# Altium PCB Main.PcbDoc
Units mm, origin at the board's own origin, x right, y up, seen from the top; angles counter-clockwise.
Board outline 99 x 40.5 mm, 4 copper layers (Top Layer, Ground Layer, Power Layer, Bottom Layer), stack 1.591 mm thick; 14 components, 11 nets, 65 pads, 2 vias.
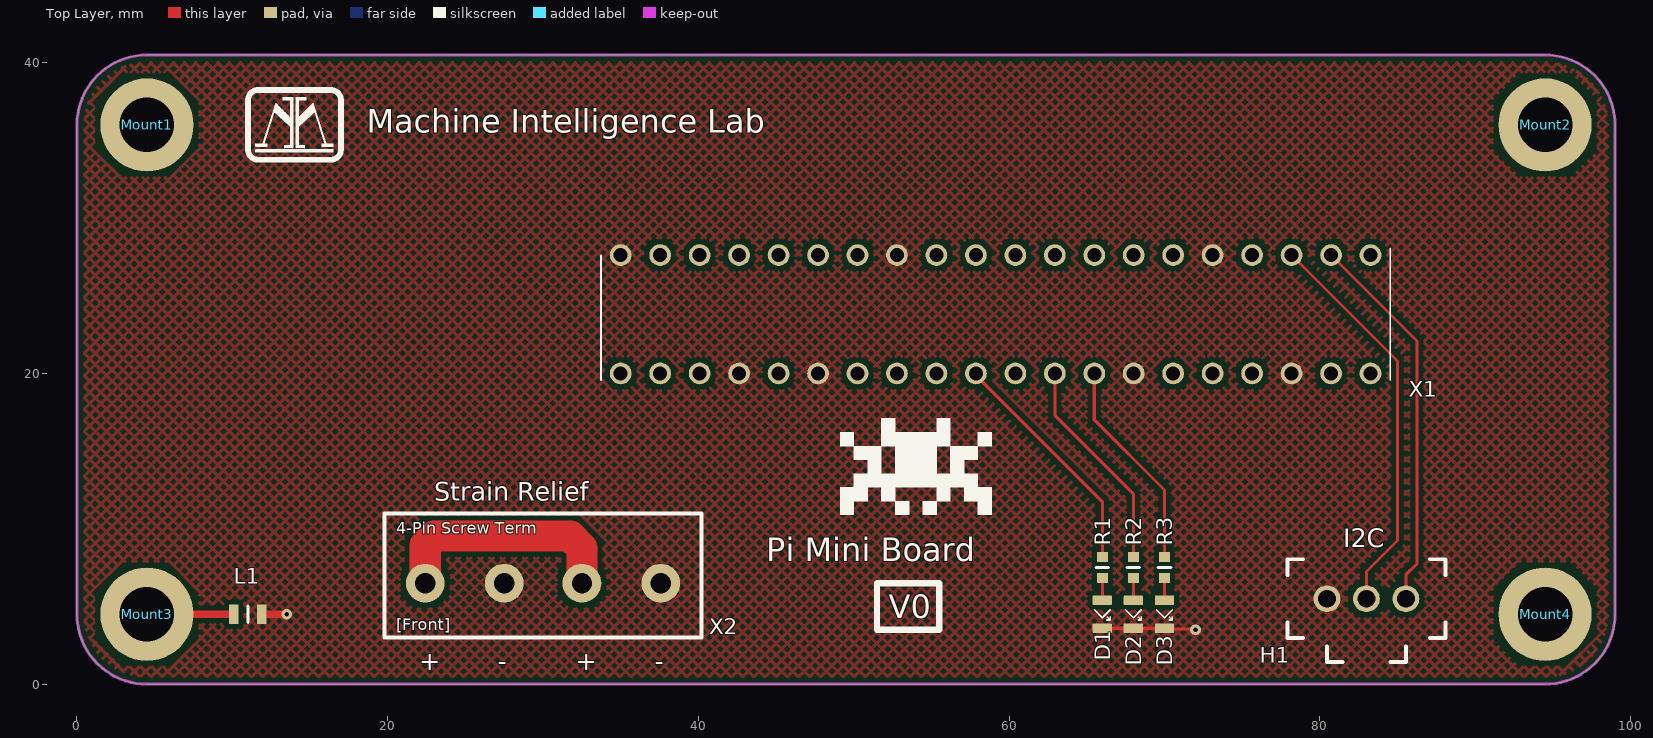
[diagram p0: Top Layer view]
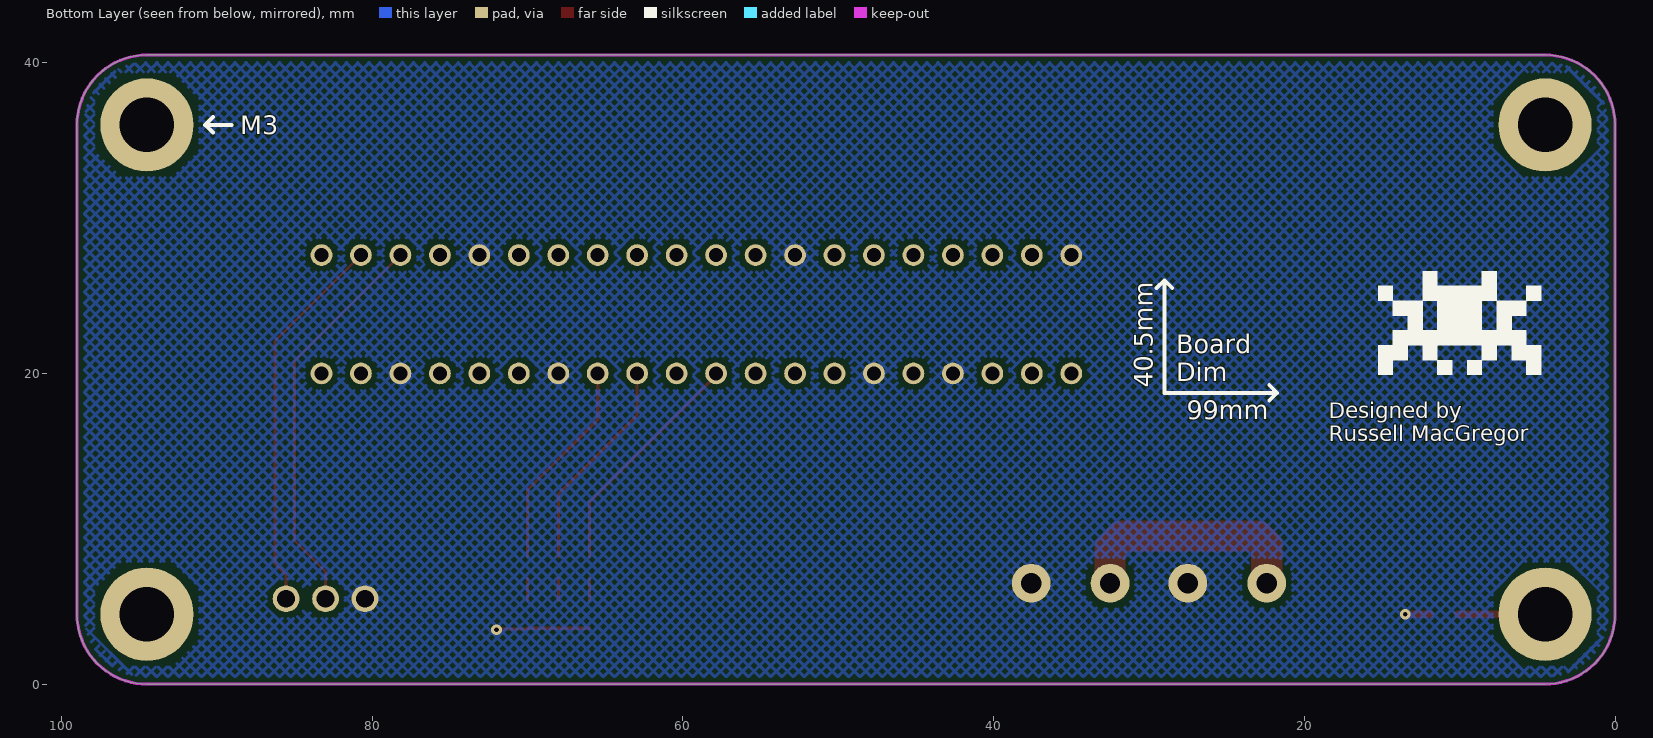
[diagram p1: Bottom Layer view, seen from below]
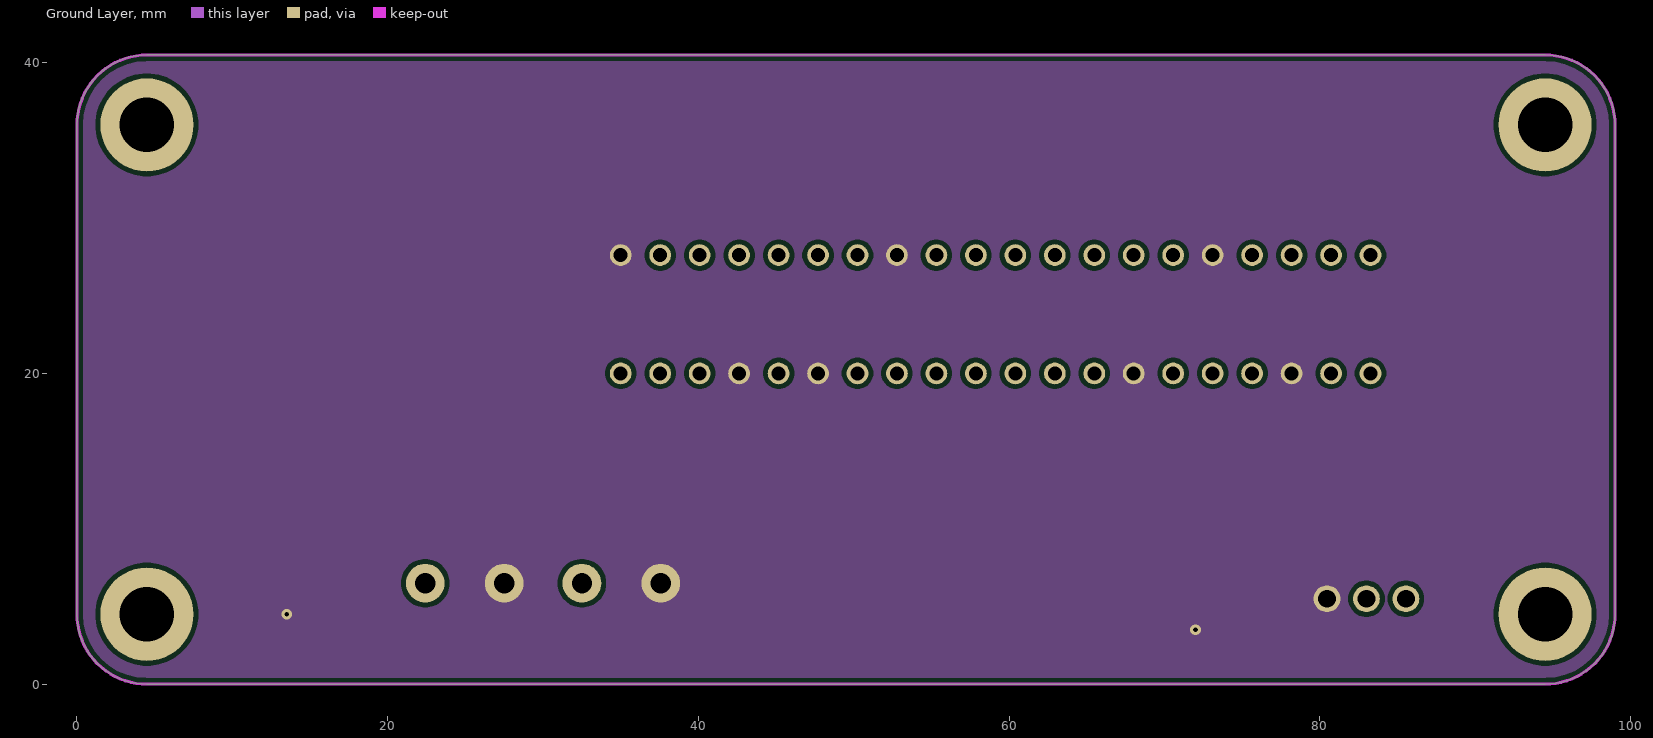
[diagram p2: Ground Layer]
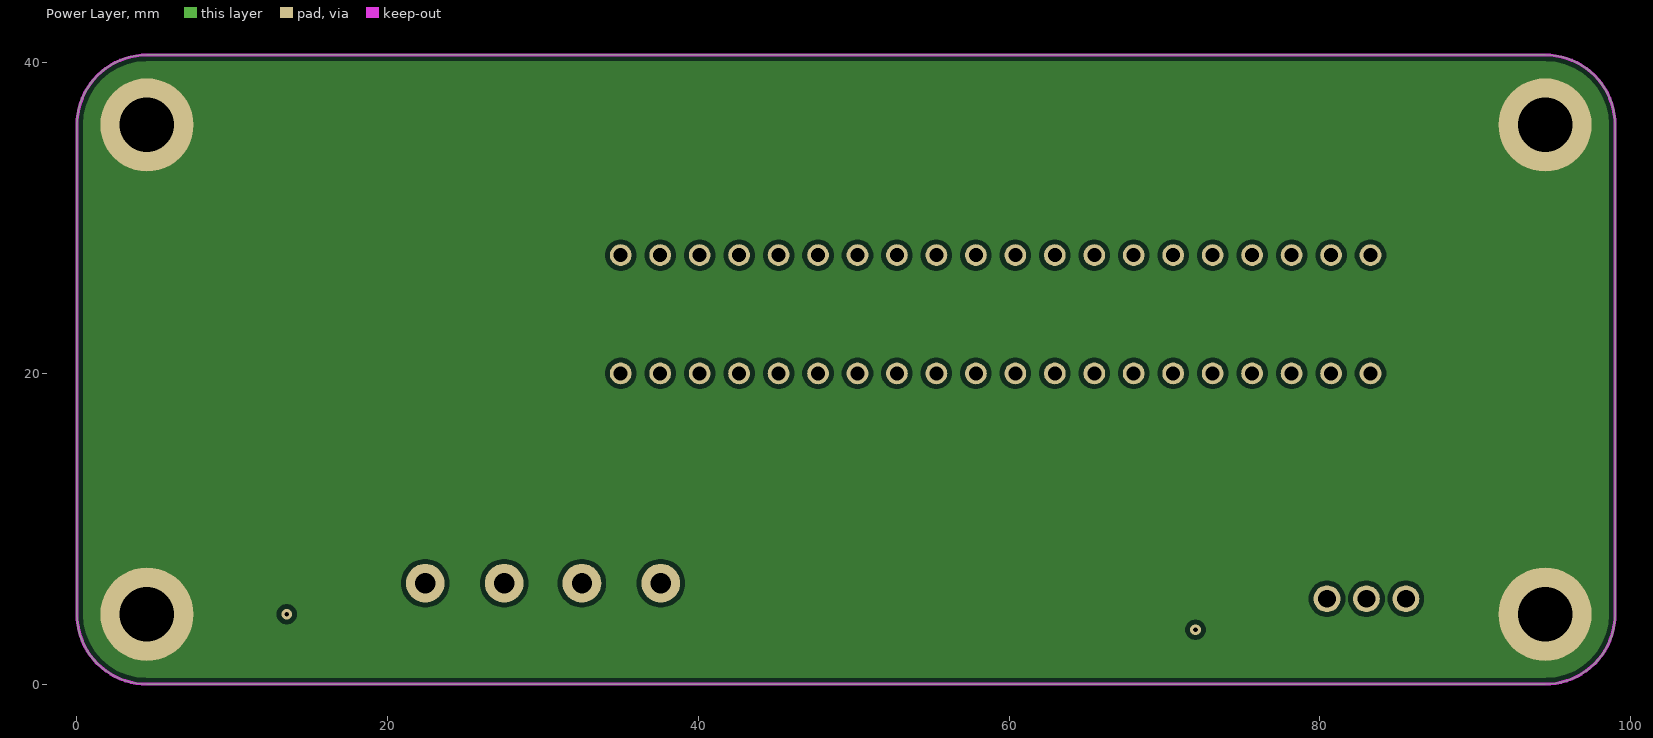
[diagram p3: Power Layer]

## Layer stack, top to bottom
Top Solder: solder mask 0.0102, Solder Resist, Dk 3.8
Top Layer: signal copper 0.035
Dielectric 2: prepreg 0.2104, 7628*1, Dk 4.4
Ground Layer: signal copper 0.0175
Dielectric 1: dielectric 1.065, FR-4, Dk 4.8
Power Layer: signal copper 0.0175
Dielectric 3: prepreg 0.2104, 7628*1, Dk 4.4
Bottom Layer: signal copper 0.035
Bottom Solder: solder mask 0.0102, Solder Resist, Dk 3.8

## Board outline
0,4.5 0,36 cw(c4.5,36) 4.5,40.5 94.5,40.5 cw(c94.5,36) 99,36 99,4.5 cw(c94.5,4.5) 94.5,0 4.5,0 cw(c4.5,4.5)

## Design rules (kind name [scope] priority, off if disabled: settings)
BoardOutlineClearance [All] p1: gap=0.2 ignorepadtopadclearanceinfootprint=FALSE
Clearance "inPolygon Clearance" [InPolygon] p1: gap=0.3 ignorepadtopadclearanceinfootprint=TRUE // this rule ensures that every net within a polygon of a different net has a set clearance from the poly
Clearance "Different Diff Pair" [All] p2: gap=0.2 ignorepadtopadclearanceinfootprint=TRUE
Clearance "Same Diff Pair" [All] p3: gap=0.1 ignorepadtopadclearanceinfootprint=TRUE
Clearance "Different Nets" [not InAnyDifferentialPair] p4: gap=0.3 ignorepadtopadclearanceinfootprint=TRUE except(0.1: Arc-SMDPad Arc-THPad Arc-Via Arc-Text Track-SMDPad Track-THPad Track-Via Track-Text SMDPad-Text THPad-Text Via-Text Fill-Text Poly-Text Region-Text Text-Text; 0.12: Arc-Arc Arc-Track Track-Track; 0.15: SMDPad-SMDPad SMDPad-THPad SMDPad-Via THPad-THPad THPad-Via Via-Via; 0.2: Arc-Hole Track-Hole SMDPad-Hole THPad-Hole Via-Hole Fill-Hole Poly-Hole Region-Hole Text-Hole)
Clearance "Same Net" [not InAnyDifferentialPair] p5: gap=0 ignorepadtopadclearanceinfootprint=TRUE except(0.1: THPad-Via; 0.18: Arc-Arc Arc-Track Track-Track)
ComponentClearance [All] p1: gap=0.102 collisioncheckmode=3 verticalgap=0.102 showdistances=TRUE
DiffPairsRouting "Ethernet Routing" [InDifferentialPairClass('Ethernet_Pairs')] p1: maxlimit=0.25 minlimit=0.2 mostfreqgap=0.25 toplayer_maxgap=0.2 toplayer_prefgap=0.2 toplayer_minwidth=0.25 toplayer_maxwidth=0.25 toplayer_prefwidth=0.25 midlayer1_mingap=0.25 midlayer1_minwidth=0.19 midlayer1_maxwidth=0.19 midlayer1_prefwidth=0.19 midlayer2_mingap=0.25 midlayer2_minwidth=0.19 midlayer2_maxwidth=0.19 midlayer2_prefwidth=0.19 bottomlayer_maxgap=0.2 bottomlayer_prefgap=0.2 bottomlayer_minwidth=0.25 bottomlayer_maxwidth=0.25 bottomlayer_prefwidth=0.25 impedanceprofiledriven=TRUE maxuncoupledlength=12.7
DiffPairsRouting "USB Routing" [InDifferentialPairClass('USB_Pairs')] p2: maxlimit=0.291 minlimit=0.127 mostfreqgap=0.291 toplayer_maxgap=0.127 toplayer_prefgap=0.127 toplayer_minwidth=0.23 toplayer_maxwidth=0.23 toplayer_prefwidth=0.23 midlayer1_mingap=0.291 midlayer1_minwidth=0.25 midlayer1_maxwidth=0.25 midlayer1_prefwidth=0.25 midlayer2_mingap=0.291 midlayer2_minwidth=0.25 midlayer2_maxwidth=0.25 midlayer2_prefwidth=0.25 bottomlayer_maxgap=0.127 bottomlayer_prefgap=0.127 bottomlayer_minwidth=0.23 bottomlayer_maxwidth=0.23 bottomlayer_prefwidth=0.23 impedanceprofiledriven=TRUE maxuncoupledlength=12.7
DiffPairsRouting "CAN Routing" [InDifferentialPairClass('CAN_Pairs')] p3: maxlimit=0.907 minlimit=0.5 mostfreqgap=0.907 toplayer_maxgap=0.5 toplayer_prefgap=0.5 toplayer_minwidth=0.201 toplayer_maxwidth=0.201 toplayer_prefwidth=0.201 midlayer1_mingap=0.907 midlayer1_minwidth=0.155 midlayer1_maxwidth=0.155 midlayer1_prefwidth=0.155 midlayer2_mingap=0.907 midlayer2_minwidth=0.155 midlayer2_maxwidth=0.155 midlayer2_prefwidth=0.155 bottomlayer_maxgap=0.5 bottomlayer_prefgap=0.5 bottomlayer_minwidth=0.201 bottomlayer_maxwidth=0.201 bottomlayer_prefwidth=0.201 impedanceprofiledriven=TRUE maxuncoupledlength=12.7
Height [All] p1: minheight=0 maxheight=1816.048 prefheight=12.7
HoleSize [All] p1: absolutevalues=TRUE maxlimit=6.3 minlimit=0.3 maxpercent=80.000 minpercent=20.000
HoleToHoleClearance [All] p1: gap=0.25 allowstackedmicrovias=FALSE
Length [All] p1: maxlimit=43.432 minlimit=0 usedelayunits=TRUE mindelay=0.000000 maxdelay=10000.000000
MatchedLengths "Diff Pair Matched Delays" [InDifferentialPairClass('Ethernet_Pairs') or InDifferentialPairClass('USB_Pairs') or InDifferentialPairClass('CAN_Pairs')] p1: tolerance=5 checknetsindiffpair=TRUE checkdiffpairvsdiffpair=FALSE checkxsignals=FALSE checkothers=FALSE usedelayunits=TRUE delaytolerance=100.000000
MinimumAnnularRing [All] p1: minimumring=0.2
MinimumSolderMaskSliver [All] p1: minsoldermaskwidth=0
PlaneClearance "Supply Net Clearance" [InNetClass('Supply_Nets')] p1: clearance=0.5
PlaneClearance "All Nets" [All] p2: clearance=0.3
PolygonConnect "Supply Nets" [InNetClass('Supply_Nets')] p1: connectstyle=Direct reliefconductorwidth=0.3 reliefentries=4 polygonreliefangle="90 Angle" airgapwidth=0.254
PolygonConnect General [All] p2: connectstyle=Relief reliefconductorwidth=0.254 reliefentries=4 polygonreliefangle="90 Angle" airgapwidth=0.254
RoutingVias [All] p1: holewidth=0.2 width=0.35 viastyle="Through Hole" minholewidth=0.15 minwidth=0.3 maxholewidth=6.3 maxwidth=6.55
SilkToSilkClearance [All] p1: silktosilkclearance=0
SilkToSolderMaskClearance [All] p1: minsilkscreentomaskgap=0 clearancetoexposedcopper=TRUE
SolderMaskExpansion [All] p1: expansion=0.075 istentingtop=FALSE
SupplyNets "Schematic Supply Nets" [InNet('+5V')] p1: voltage=0.000
SupplyNets "Schematic Supply Nets_3" [InNet('GND')] p2: voltage=0.000
SupplyNets "Schematic Supply Nets_1" [InNet('Earth')] p3: voltage=0.000
UnRoutedNet [All] p1: checkbadconnections=TRUE
Width "nRF Width" [InNetClass('nRF Signal')] p1: maxlimit=0.379 minlimit=0.263 preferedwidth=0.379 toplayer_minwidth=0.379 midlayer1_maxwidth=0.263 midlayer1_prefwidth=0.263 midlayer2_maxwidth=0.263 midlayer2_prefwidth=0.263 bottomlayer_minwidth=0.379 impedanceprofiledriven=TRUE minimp=50.000000 maximp=50.000000 favimp=50.000000 checkconnectedcopper=TRUE
Width [All] p2: maxlimit=100 minlimit=0.1 preferedwidth=0.3
20 further rules are at their usual default settings.

## Classes and differential pairs
net class Supply_Nets: +5V Earth GND

## Components (designator, comment, footprint, x,y, rotation, side; value= is the part's Value field where it differs from the comment)
D1 "SMD LED" "[LED] SMD 0805" 66,4.5 r270 top
D2 "SMD LED" "[LED] SMD 0805" 68,4.5 r270 top
D3 "SMD LED" "[LED] SMD 0805" 70,4.5 r270 top
H1 "1x3 Male" "[Header] Shrouded 1x3 Male" 83,5.5 r180 top
L1 "652-MH2029-300Y" "[Ferrite] SMD Bead 0805 (1)" 11,4.5 r0 top
Mount1 "M3 Mount Hole" "[Mount] M3 Mount Hole" 4.5,36 r0 top
Mount2 "M3 Mount Hole" "[Mount] M3 Mount Hole" 94.5,36 r90 top
Mount3 "M3 Mount Hole" "[Mount] M3 Mount Hole" 4.5,4.5 r90 top
Mount4 "M3 Mount Hole" "[Mount] M3 Mount Hole" 94.5,4.5 r90 top
R1 "[Res] SMD Resistor" "[Res] SMD 0603" 66,7.5 r90 top
R2 "[Res] SMD Resistor" "[Res] SMD 0603" 68,7.5 r90 top
R3 "[Res] SMD Resistor" "[Res] SMD 0603" 70,7.5 r90 top
X1 "Raspberry Pi 5" "[Device] Raspberry Pi 5" 35,20 r0 top
X2 "4pin Screw Terminal" "[Screw Terminal] 4pin 5mm" 30,6.5 r0 top

## Footprints (in the part's own frame and the unit in brackets; to place one, negate y for a bottom-side part, rotate by r counter-clockwise, add the part's x,y. Pads: shape width x height; smd on the part's side, far side on the other; paste and mask are expansions set on the pad)
"[Device] Raspberry Pi 5" [mm]
  round 1.4 hole 0.9: 1(48.26,7.62) 2(48.26,0) 3(45.72,7.62) 4(45.72,0) 5(43.18,7.62) 7(40.64,7.62) 8(40.64,0) 10(38.1,0) 11(35.56,7.62) 12(35.56,0) 13(33.02,7.62) 15(30.48,7.62) 16(30.48,0) 17(27.94,7.62) 18(27.94,0) 19(25.4,7.62) 20(25.4,0) 21(22.86,7.62) 22(22.86,0) 23(20.32,7.62) 24(20.32,0) 26(17.78,0) 27(15.24,7.62) 28(15.24,0) 29(12.7,7.62) 31(10.16,7.62) 32(10.16,0) 33(7.62,7.62) 35(5.08,7.62) 36(5.08,0) 37(2.54,7.62) 38(2.54,0) 40(0,0) GND(0,7.62) GND(7.62,0) GND(12.7,0) GND(17.78,7.62) GND(33.02,0) GND(38.1,7.62) GND(43.18,0)
  silkscreen extent -1.27,-0.44 49.53,8.06, body extent -32.39,-7.99 56.65,12.65, height 56.94
"[Ferrite] SMD Bead 0805 (1)" [mm]
  rect 0.6x1.25 smd: 1(-0.9,0) 2(0.9,0)
  silkscreen extent 0,-0.53 0,0.53, body extent -1,-0.6 1,0.6, height 1.1
"[Header] Shrouded 1x3 Male" [mm] "070543-0037 / Mates with 005057-9403"
  round 1.725 hole 1.15: 1(-2.54,0) 2(0,0) 3(2.54,0)
  silkscreen extent -5.08,-2.54 5.09,4.06, body extent -5.08,-2.54 5.08,4.06, height 11.67
"[LED] SMD 0805" [mm]
  rrect20% 0.6x1.25 smd: 1(-0.9,0) 2(0.9,0)
  silkscreen extent -0.28,-0.51 0.37,0.51, body extent -1,-0.65 1,0.65, height 0.8
"[Mount] M3 Mount Hole" [mm] "Place at least 4.5mm from board edge. Plated."
  round 6 hole 3.5: 1(0,0)
"[Res] SMD 0603" [mm]
  rect 0.65x0.7 smd: 1(-0.675,0) 2(0.675,0)
  silkscreen extent 0,-0.4 0,0.4, body extent -0.8,-0.45 0.8,0.45, height 0.8
"[Screw Terminal] 4pin 5mm" [mm]
  round 2.5 hole 1.3: 1(-7.58,0) 2(-2.5,0) 3(2.5,0) 4(7.58,0)
  silkscreen extent -10.2,-3.5 10.2,4.5, body extent -10.53,-3.5 10.09,4.1, height 9.99

## Part data
D1: library part "[LED] SMD", "Generic", Color=Green, Size Package=0805, Supplier Part Number 1=475-LGR971-KN-1CT-ND, Supplier 1=DigiKey
D2: library part "[LED] SMD", "Generic", Color=Yellow, Size Package=0805, Supplier Part Number 1=475-LYR976-PS-36-0-20-R18CT-ND, Supplier 1=DigiKey
D3: library part "[LED] SMD", "Generic", Color=Red, Supplier Part Number 1=475-LSR976-NR-1CT-ND, Supplier 1=DigiKey
H1: library part "[Header] Shrouded 1x3 Male", "070543-0037 / Mates with 005057-9403", Supplier Part Number 1=WM4825-ND, Supplier 1=DigiKey, Supplier 2=DigiKey, Supplier Part Number 2=WM2901-ND
L1: library part "[Ferrite] SMD Ferrite Bead (1)", Res @ Freq="30 @ 100MHz", Size Package=0805, Supplier Part Number 1=MH2029-300YCT-ND, Supplier 1=DigiKey
Mount1 Mount2 Mount3 Mount4: library part "[Mount] M3 Mount Hole", "Place at least 4.5mm from board edge. Plated."
R1 R2: "Generic", Resistance=1k, Size Package=0603, Supplier Part Number 1=RMCF0603FT1K00DKR-ND, Tolerance=5%, Supplier 1=DigiKey
R3: "Generic", Resistance=1k, Size Package=0603, Supplier Part Number 1=RMCF0603FT1K00DKR-ND, Supplier 1=DigiKey
X1: library part "[Device] Raspberry Pi 5", Supplier Part Number 1=XG4H-4034-ND, Supplier 1=DigiKey
X2: library part "[Screw Terminal] 4pin", Supplier Part Number 1=102-6147-ND, Supplier 1=DigiKey

## Via types
v1: diameter 0.7, hole 0.3, Top Layer to Bottom Layer, 2 vias

## Nets (pads, with @x,y where several pads share a name; then routed paths per layer and width w, separated by ;. In a path a pad name is that pad's centre, name@x,y a point inside that pad or via, vN(x,y) a via of type N, cw(c..) or ccw(c..) an arc to the next point about the centre after c; other vN are vias at no path point)
+5V: X2.1 X2.3 | length 15.4
  Top Layer w2: X2.1 22.42,8.958 22.987,9.525 31.75,9.525 32.5,8.775 X2.3
Earth: L1.1 Mount1.1 Mount2.1 Mount3.1 Mount4.1 | length 5.6
  Top Layer w0.5: Mount3.1 L1.1
GND: D1.2 D2.2 D3.2 H1.3 L1.2 X1.GND X2.2 X2.4 | length 7.6
  Top Layer w0.2: D1.2 D2.2 D3.2 70.05,3.55 71.95,3.55 v1(72,3.5)
  Top Layer w0.5: L1.2 v1(13.5,4.5)
LED1: R1.2 X1.22 | length 15.2
  Top Layer w0.2: X1.22 57.86,19.89 66,11.75 R1.2
LED2: R2.2 X1.18 | length 13.9
  Top Layer w0.2: X1.18 62.94,17.31 68,12.25 R2.2
LED3: R3.2 X1.16 | length 13.7
  Top Layer w0.2: X1.16 65.48,17.02 70,12.5 R3.2
NetD1_1: D1.1 R1.1 | length 1.4
  Top Layer w0.2: D1.1 R1.1
NetD2_1: D2.1 R2.1 | length 1.4
  Top Layer w0.2: D2.1 R2.1
NetD3_1: D3.1 R3.1 | length 1.4
  Top Layer w0.2: D3.1 R3.1
SCL0: H1.2 X1.5 | length 25.8
  Top Layer w0.2: X1.5 83.55,22.25 85,20.8 85,9.25 83,7.25 H1.2
SDA0: H1.1 X1.3 | length 24.7
  Top Layer w0.2: X1.3 86.25,22.09 86.25,7.75 85.54,7.04 H1.1
pads on no net: X1.1 X1.2 X1.4 X1.7 X1.8 X1.10 X1.11 X1.12 X1.13 X1.15 X1.17 X1.19 X1.20 X1.21 X1.23 X1.24 X1.26 X1.27 X1.28 X1.29 X1.31 X1.32 X1.33 X1.35 X1.36 X1.37 X1.38 X1.40

## Polygon pours and split planes (outlines as drawn)
Earth on Power Layer "Earth Power Poly" (solid, remove dead copper, pour order 1): 0,0 0,40.5 99,40.5 99,0
GND on Ground Layer "GND Power Poly" (solid, remove dead copper, pour order 2): 0,0 0,40.5 99,40.5 99,0
GND on Top Layer "Top GND Poly" (hatched 45Degree grid 0.508 track 0.203, remove dead copper, pour order 3): 0,0 0,40.5 99,40.5 99,0
GND on Bottom Layer "Bottom GND Poly" (hatched 45Degree grid 0.508 track 0.203, remove dead copper, pour order 0): 0,0 0,40.5 99,40.5 99,0

## Keep-outs
Keep-Out Layer:
  the board outline again, w0.2

## Silkscreen, mask and mechanical layers (free items; w line width, h text height)
Top Overlay:
  drawing of 13 lines, arcs and shapes, not listed
  text "Machine Intelligence Lab" at 18.65,35.5 h1.5
  text "Strain Relief" at 23.002,11.8 h1.2
  text "I2C" at 81.5,8.8 h1.2
  text "Pi Mini Board" at 44.378,7.9 h1.5
  text "V0" at 52.25,4.25 h1.5
  text "+" at 22.02,0.9 h1.2
  text "-" at 27.1,0.9 h1.2
  text "+" at 32.1,0.9 h1.2
  text "-" at 37.18,0.9 h1.2
Bottom Overlay:
  region: 7.631,26.591 8.568,26.591 8.568,25.636 11.432,25.636 11.432,26.591 12.386,26.591 12.386,24.682 11.432,24.682 11.432,22.773 12.386,22.773 12.386,24.682 14.295,24.682 14.295,23.728 14.294,23.728 14.294,23.727 13.341,23.727 13.341,22.773 14.294,22.773 14.294,22.771 14.295,22.771 14.295,21.818 15.25,21.818 15.25,19.909 14.295,19.909 14.295,20.864 13.342,20.864 13.342,20.865 13.341,20.865 13.341,21.818 12.386,21.818 12.386,20.865 12.385,20.865 12.385,20.864 11.432,20.864 11.432,21.818 8.568,21.818 8.568,20.864 7.615,20.864 7.615,20.865 7.614,20.865 7.614,21.818 6.659,21.818 6.659,20.865 6.658,20.865 6.658,20.864 5.705,20.864 5.705,19.909 4.75,19.909 4.75,21.818 5.705,21.818 5.705,22.771 5.706,22.771 5.706,22.773 6.659,22.773 6.659,23.727 5.706,23.727 5.706,23.728 5.705,23.728 5.705,24.682 7.614,24.682 7.614,22.773 8.568,22.773 8.568,24.682 7.614,24.682 7.614,26.591 7.629,26.591
  region: 11.432,20.788 11.432,19.909 10.477,19.909 10.477,20.862 10.478,20.862 10.478,20.864 11.432,20.864 11.432,20.789
  region: 14.295,24.976 14.295,25.635 14.297,25.635 14.297,25.636 15.25,25.636 15.25,24.682 14.295,24.682 14.295,24.975
  region: 4.75,25.369 4.75,25.636 5.703,25.636 5.703,25.635 5.705,25.635 5.705,24.682 4.75,24.682 4.75,25.368
  region: 8.925,19.909 8.568,19.909 8.568,20.864 9.522,20.864 9.522,20.862 9.523,20.862 9.523,19.909 8.926,19.909
  lines w0.254: 21.75,18.758 22.258,18.25 ; 22.258,19.258 21.75,18.75 29,18.75 29,26 29.508,25.492 ; 28.5,25.492 29.008,26 ; 89.05,36 90.75,36 90.242,36.508 ; 90.242,35.5 90.75,36.008
  text "M3" at 88.5,35.4 h1.2
  text "Board" at 28.25,21.3 h1.2
  text "Dim" at 28.25,19.5 h1.2
  text "40.5mm" at 29.75,19.076 h1.2 r270
  text "99mm" at 27.574,17.05 h1.2
  text "Designed by / Russell MacGregor" at 18.422,15.627 h1

## Text inside footprints (layer, text, board x,y; h text height)
X2: Top Overlay "[Front]" at 20.538,3.458 h0.75; Top Overlay "4-Pin Screw Term" at 20.538,9.681 h0.75